# Altium PCB 电流电压转换.PcbDoc
Units mil, origin at the board's own origin, x right, y up, seen from the top; angles counter-clockwise.
Board outline 2890 x 2060 mil, 2 copper layers (Top Layer, Bottom Layer); 21 components, 16 nets, 63 pads, 0 vias.
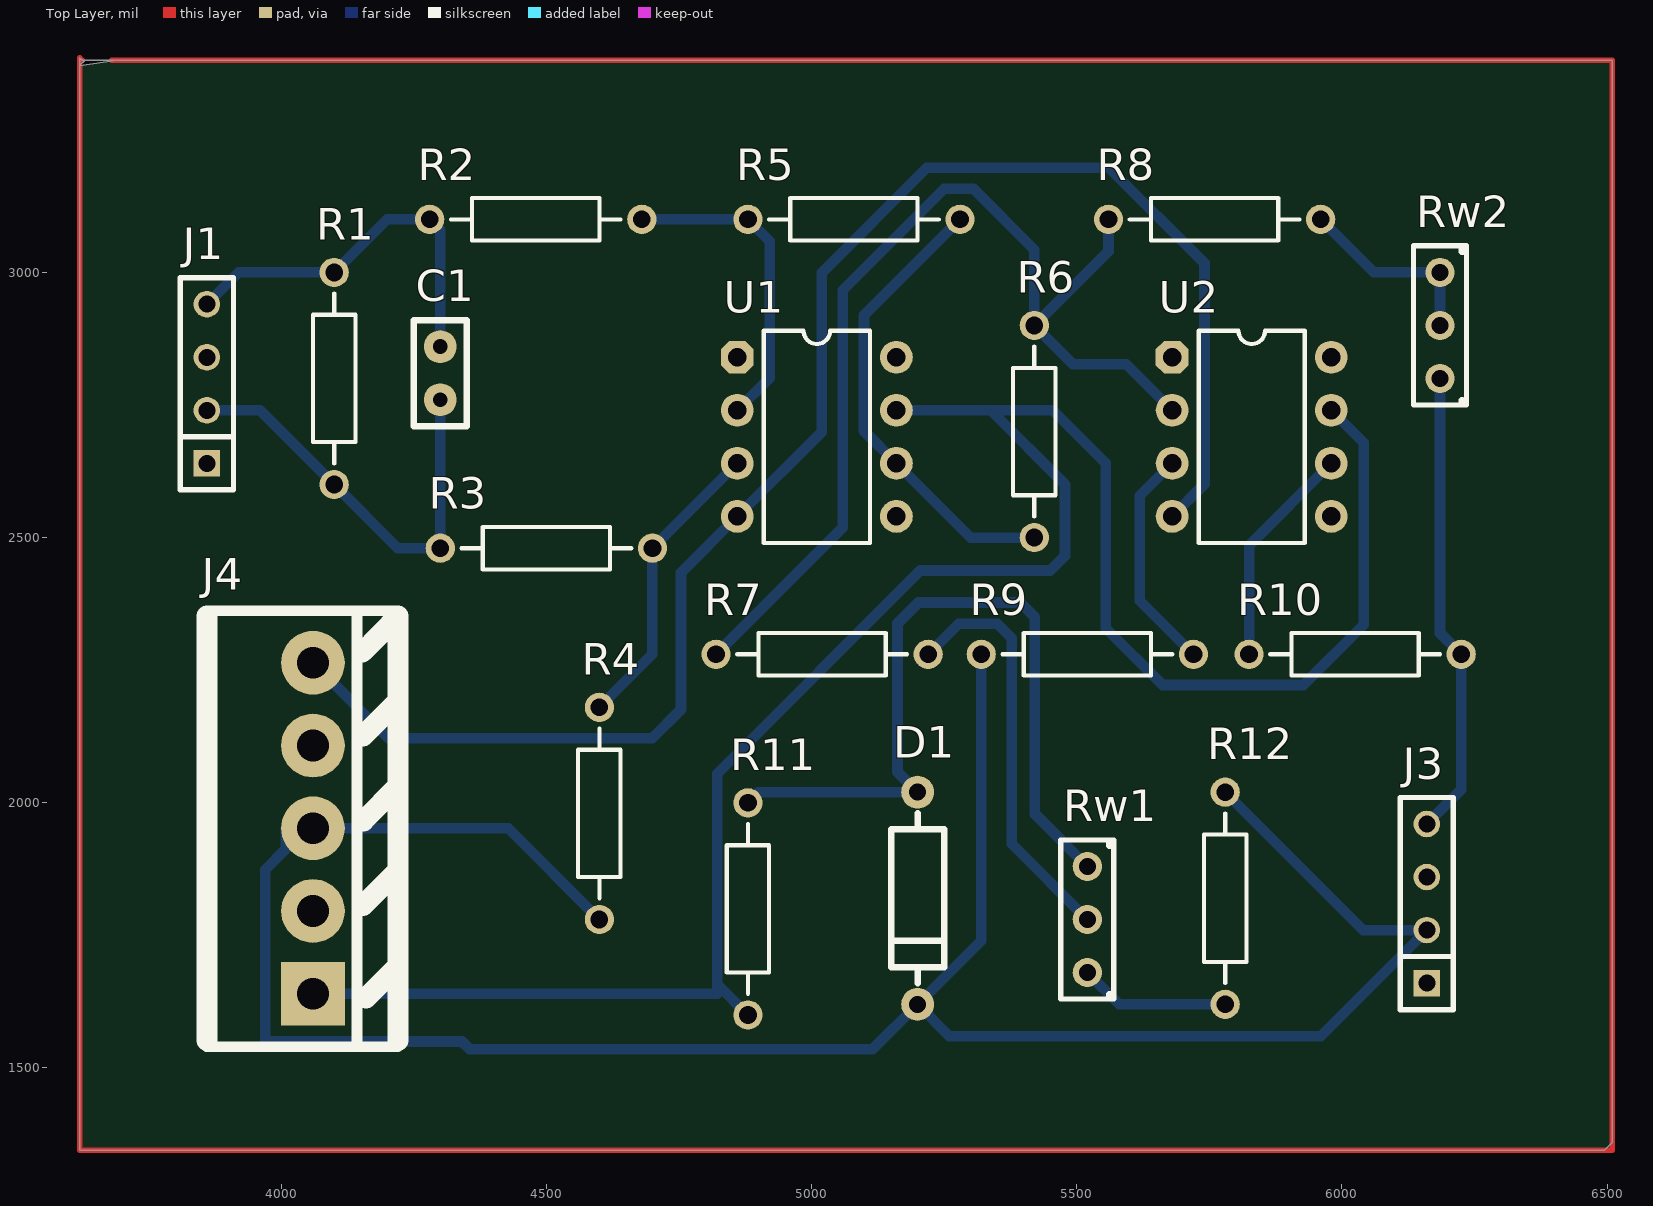
[diagram p0: Top Layer view]
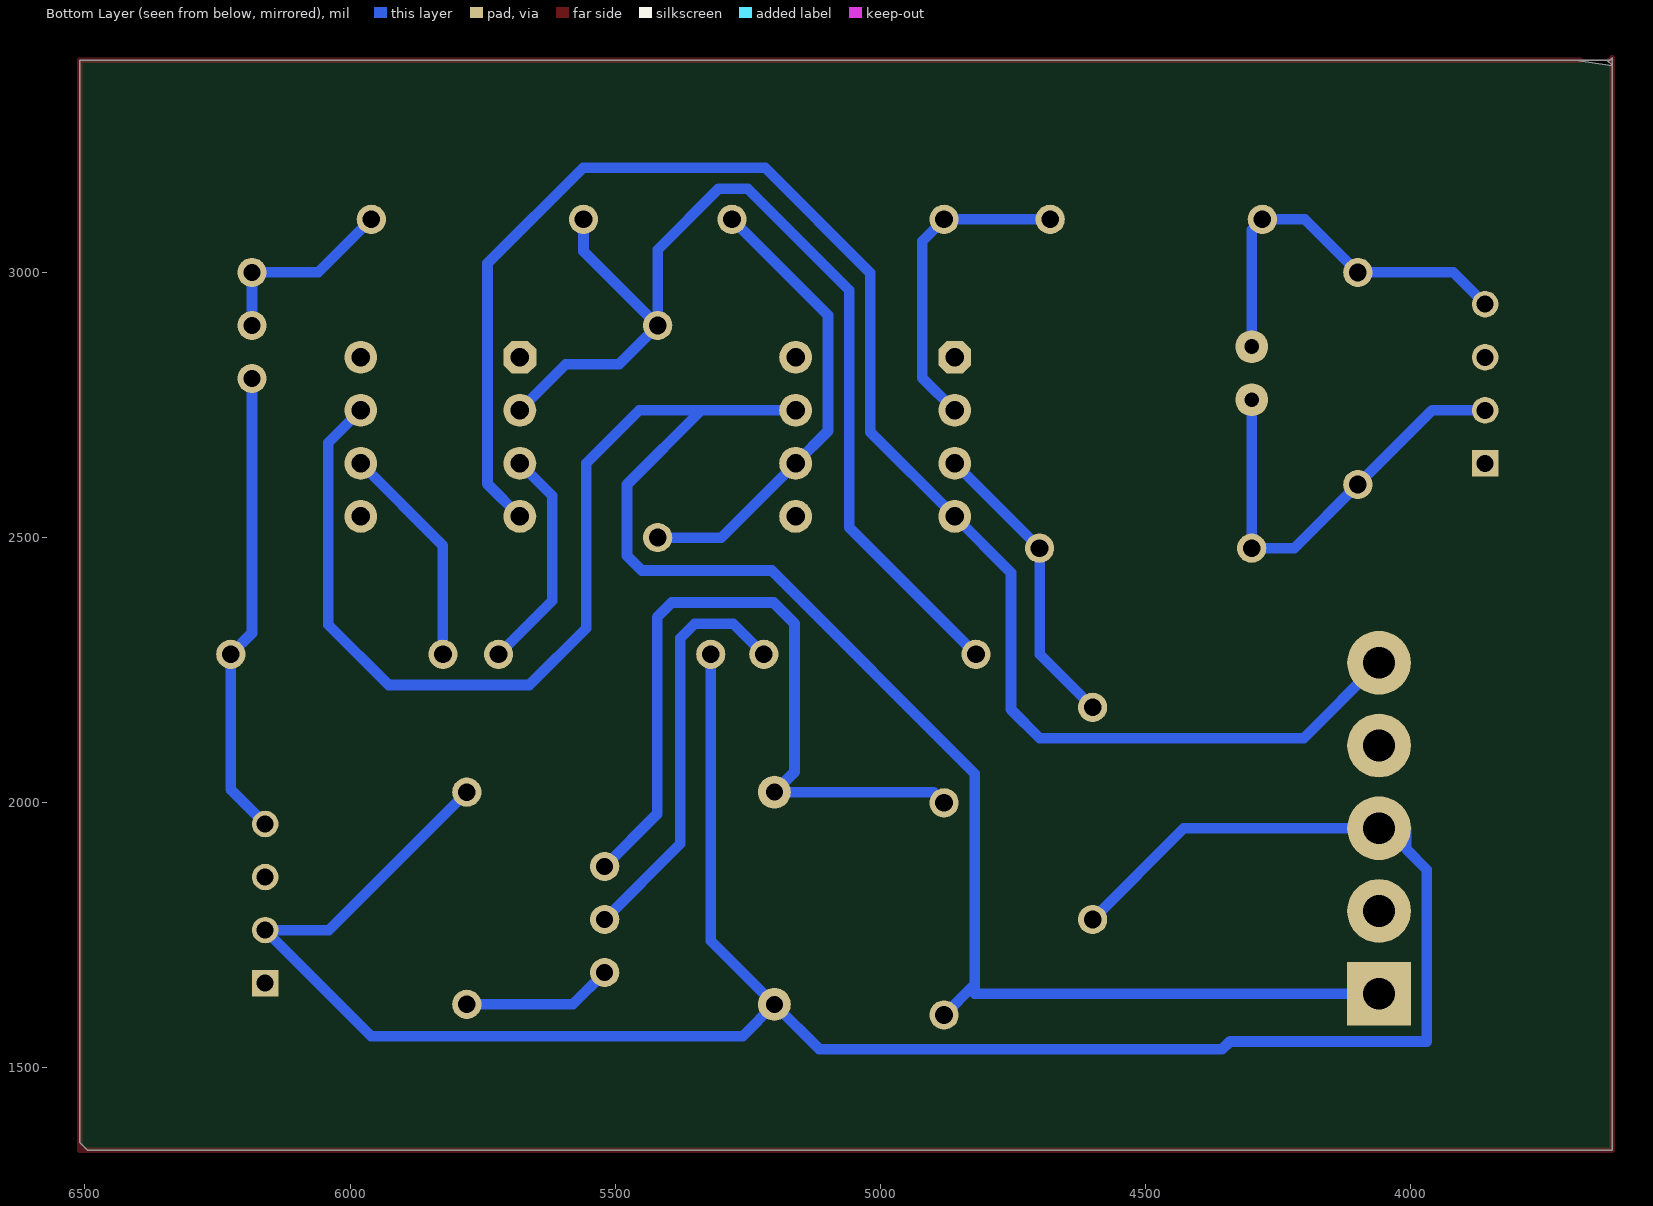
[diagram p1: Bottom Layer view, seen from below]

## Layer stack, top to bottom
Top Layer: signal copper 1.4
Dielectric: dielectric 12.6, FR-4, Dk 4.8
Bottom Layer: signal copper 1.4

## Board outline
3620,3390 3630,3400 6510,3400 6510,1360 6495,1345 3620,1345 3620,3405 3625,3400 3690,3400

## Design rules (kind name [scope] priority, off if disabled: settings)
Clearance [All] p1: gap=20
PolygonConnect [All] p1: connectstyle=Relief reliefconductorwidth=10 reliefentries=4 polygonreliefangle="90 Angle"
RoutingLayers [All] p1: top layer_v5=FALSE bottom layer_v5=TRUE
RoutingVias [All] p1: holewidth=28 width=50 viastyle="Through Hole" minholewidth=28 minwidth=50 maxholewidth=28 maxwidth=50
SilkscreenOverComponentPads [All] p1: minsilkscreentomaskgap=10
SolderMaskExpansion [All] p1: expansion=4
TestPointUsage [All] p1: valid=0 allowmultiple=FALSE
Testpoint [All] p1: side=15 testpointundercomponent=TRUE minsize=40 maxsize=100 preferedsize=60 minholesize=0 maxholesize=40 preferedholesize=32 testpointgrid=1 style=1023 order=0123456789
Width [All] p1: maxlimit=30 minlimit=10 preferedwidth=10 toplayer_minwidth=15 toplayer_prefwidth=20 bottomlayer_minwidth=15 bottomlayer_prefwidth=20 minimp=50.000000 maximp=50.000000 favimp=50.000000
22 further rules are at their usual default settings.

## Components (designator, comment, footprint, x,y, rotation, side; value= is the part's Value field where it differs from the comment)
C1 "Cap" RAD-0.1 4300,2860 r270 top
D1 "ZENER2" DIODE0.4 5200,2020 r270 top
J1 "CON4" SIP4 3860,2640 r90 top
J3 "CON4" SIP4 6160,1660 r90 top
J4 "CON5" "POWER PLUG5" 4060,1640 r270 top
R1 "Res2" AXIAL-0.4 4100,2800 r90 top
R2 "Res2" AXIAL-0.4 4480,3100 r0 top
R3 "Res2" AXIAL-0.4 4500,2480 r0 top
R4 "Res2" AXIAL-0.4 4600,1980 r90 top
R5 "Res2" AXIAL-0.4 5080,3100 r0 top
R6 "Res2" AXIAL-0.4 5420,2700 r90 top
R7 "Res2" AXIAL-0.4 5020,2280 r180 top
R8 "Res2" AXIAL-0.4 5760,3100 r0 top
R9 "Res2" AXIAL-0.4 5520,2280 r0 top
R10 "Res2" AXIAL-0.4 6025,2280 r180 top
R11 "Res2" AXIAL-0.4 4880,1800 r90 top
R12 "Res2" AXIAL-0.4 5780,1820 r90 top
Rw1 "10k" RP3296 5520,1880 r270 top
Rw2 "10k" RP3296 6185,3000 r270 top
U1 "UA741" DIP-8 4860,2840 r0 top
U2 "UA741" DIP-8 5680,2840 r0 top

## Footprints (in the part's own frame and the unit in brackets; to place one, negate y for a bottom-side part, rotate by r counter-clockwise, add the part's x,y. Pads: shape width x height; smd on the part's side, far side on the other; paste and mask are expansions set on the pad)
AXIAL-0.4 [mm] "Resistor; 2 Leads"
  round 1.4 hole 0.85: 1(-5.08,0) 2(5.08,0)
  silkscreen extent -4.06,-1.02 4.06,1.02
DIODE0.4 [mil]
  round 62 hole 32: A(0,0) K(400,0)
  silkscreen extent 40,-50 360,50
DIP-8 [mil]
  oct 62x62 hole 35: 1(0,0)
  round 62 hole 35: 2(0,-100) 3(0,-200) 4(0,-300) 5(300,-300) 6(300,-200) 7(300,-100) 8(300,0)
  silkscreen extent 50,-350 250,50
"POWER PLUG5" [mil]
  rect 120x120 hole 60: 1(0,0)
  round 120 hole 60: 2(-156,0) 3(-312,0) 4(-468,0) 5(-624,0)
  silkscreen extent -722,-200 100,160
RAD-0.1 [mil]
  round 62 hole 28: 1(0,0) 2(100,0)
  silkscreen extent -50,-50 150,50
RP3296 [mil]
  round 55 hole 32: 1(0,0) 2(200,0) 3(100,0)
  silkscreen extent -50,-50 250,50
SIP4 [mil]
  rect 50x50 hole 32: 1(0,0)
  round 50 hole 32: 2(100,0) 3(200,0) 4(300,0)
  silkscreen extent -50,-50 350,50

## Part data
C1: "Capacitor"
D1: "Zener Diode"
J1 J3 J4: "Connector"
R1 R2 R3 R4 R5 R6 R7 R8 R9 R10 R11 R12: "Resistor"
Rw1 Rw2: library part POT2, "Potentiometer"

## Nets (pads, with @x,y where several pads share a name; then routed paths per layer and width w, separated by ;. In a path a pad name is that pad's centre, name@x,y a point inside that pad or via, vN(x,y) a via of type N, cw(c..) or ccw(c..) an arc to the next point about the centre after c; other vN are vias at no path point)
NetC1_1: C1.1 J1.4 R1.2 R2.1 | length 734.6
  Bottom Layer w20: J1.4 3920,3000 R1.2 4200,3100 R2.1 4300,3080 C1.1
NetC1_2: C1.2 J1.2 R1.1 R3.1 | length 827.7
  Bottom Layer w20: J1.2 3960,2740 R1.1 4220,2480 R3.1 C1.2
NetD1_A: D1.A R11.2 Rw1.1 | length 1460
  Bottom Layer w20: R11.2 4900,2020 D1.A 5162,2058 5162,2338 5201.56,2377.56 5393.68,2377.56 5421.24,2350 5421.24,1978.76 Rw1.1
NetD1_K: D1.K J3.2 J4.3 R4.1 R9.1 R12.2 | length 4616.9
  Bottom Layer w20: R4.1 4428,1952 J4.3 4009,1952 4009,1913 3970,1874 3970,1550 4341,1550 4356,1535 5115,1535 D1.K ; R9.1 5320,1740 D1.K ; R12.2 6040,1760 J3.2 5960,1560 5260,1560 D1.K
NetJ3_4: J3.4 R10.1 Rw2.2 | length 883.5
  Bottom Layer w20: J3.4 6225,2025 R10.1 6185,2320 Rw2.2
NetJ4_1: J4.1 R11.1 U1.7 U2.7 | length 4349.5
  Bottom Layer w20: J4.1 4822,1640 4822,1658 ; R11.1 4822,1658 ; U2.7 6041,2679 6041,2336 5927,2222 5662,2222 5555,2329 5555,2640 5455,2740 5338,2740 ; 4822,1658 4822,2055 5205,2438 5450,2438 5478,2466 5478,2600 5338,2740 ; 5338,2740 U1.7 5338,2740
NetJ4_5: J4.5 U1.4 U2.4 | length 3089.3
  Bottom Layer w20: J4.5 4202,2122 4700,2122 4754,2176 4754,2434 U1.4 5019,2699 5019,2999 5217.56,3197.56 5560.44,3197.56 5741,3017 5741,2601 U2.4
NetR2_2: R2.2 R5.1 U1.2 | length 602.2
  Bottom Layer w20: R2.2 R5.1 4921,3059 4921,2801 U1.2
NetR3_2: R3.2 R4.2 U1.3 | length 567.7
  Bottom Layer w20: R4.2 4700,2280 R3.2 U1.3
NetR5_2: R5.2 R6.1 U1.6 | length 878.2
  Bottom Layer w20: R5.2 5099,2919 5099,2701 U1.6 5300,2500 R6.1
NetR6_2: R6.2 R7.2 R8.1 U2.2 | length 2000.4
  Bottom Layer w20: R7.2 5059,2519 5059,2966.56 5250,3157.56 5305.44,3157.56 5420,3043 R6.2 ; R8.1 5560,3040 R6.2 ; U2.2 5593.07,2826.93 5493.07,2826.93 R6.2
NetR7_1: R7.1 Rw1.3 | length 781.8
  Bottom Layer w20: R7.1 5277.56,2337.56 5350,2337.56 5377.56,2310 5377.56,1922.44 Rw1.3
NetR8_2: R8.2 Rw2.1 Rw2.3 | length 366.4
  Bottom Layer w20: R8.2 6060,3000 Rw2.1 Rw2.3
NetR9_2: R9.2 U2.3 | length 427.1
  Bottom Layer w20: U2.3 5619,2579 5619,2381 R9.2
NetR10_2: R10.2 U2.6 | length 424.2
  Bottom Layer w20: R10.2 5825,2485 U2.6
NetR12_1: R12.1 Rw1.2 | length 284.9
  Bottom Layer w20: Rw1.2 5580,1620 R12.1
pads on no net: J1.1 J1.3 J3.1 J3.3 J4.2 J4.4 U1.1 U1.5 U1.8 U2.1 U2.5 U2.8
copper on no net: | length 9842.1
  Top Layer w10: 3625,3400 3620,3405 3620,1345 6510,1345 6510,3400 3680,3400